# Altium PCB LibreSolar_BMS48V.PcbDoc (part 2 of 2)
Units mm, origin at the board's own origin, x right, y up, seen from the top; angles counter-clockwise.
Board outline 165 x 165 mm, 2 copper layers (Top, Bottom); 195 components, 138 nets, 620 pads, 56 vias.
Unrouted connection lines stored in the file: 54.
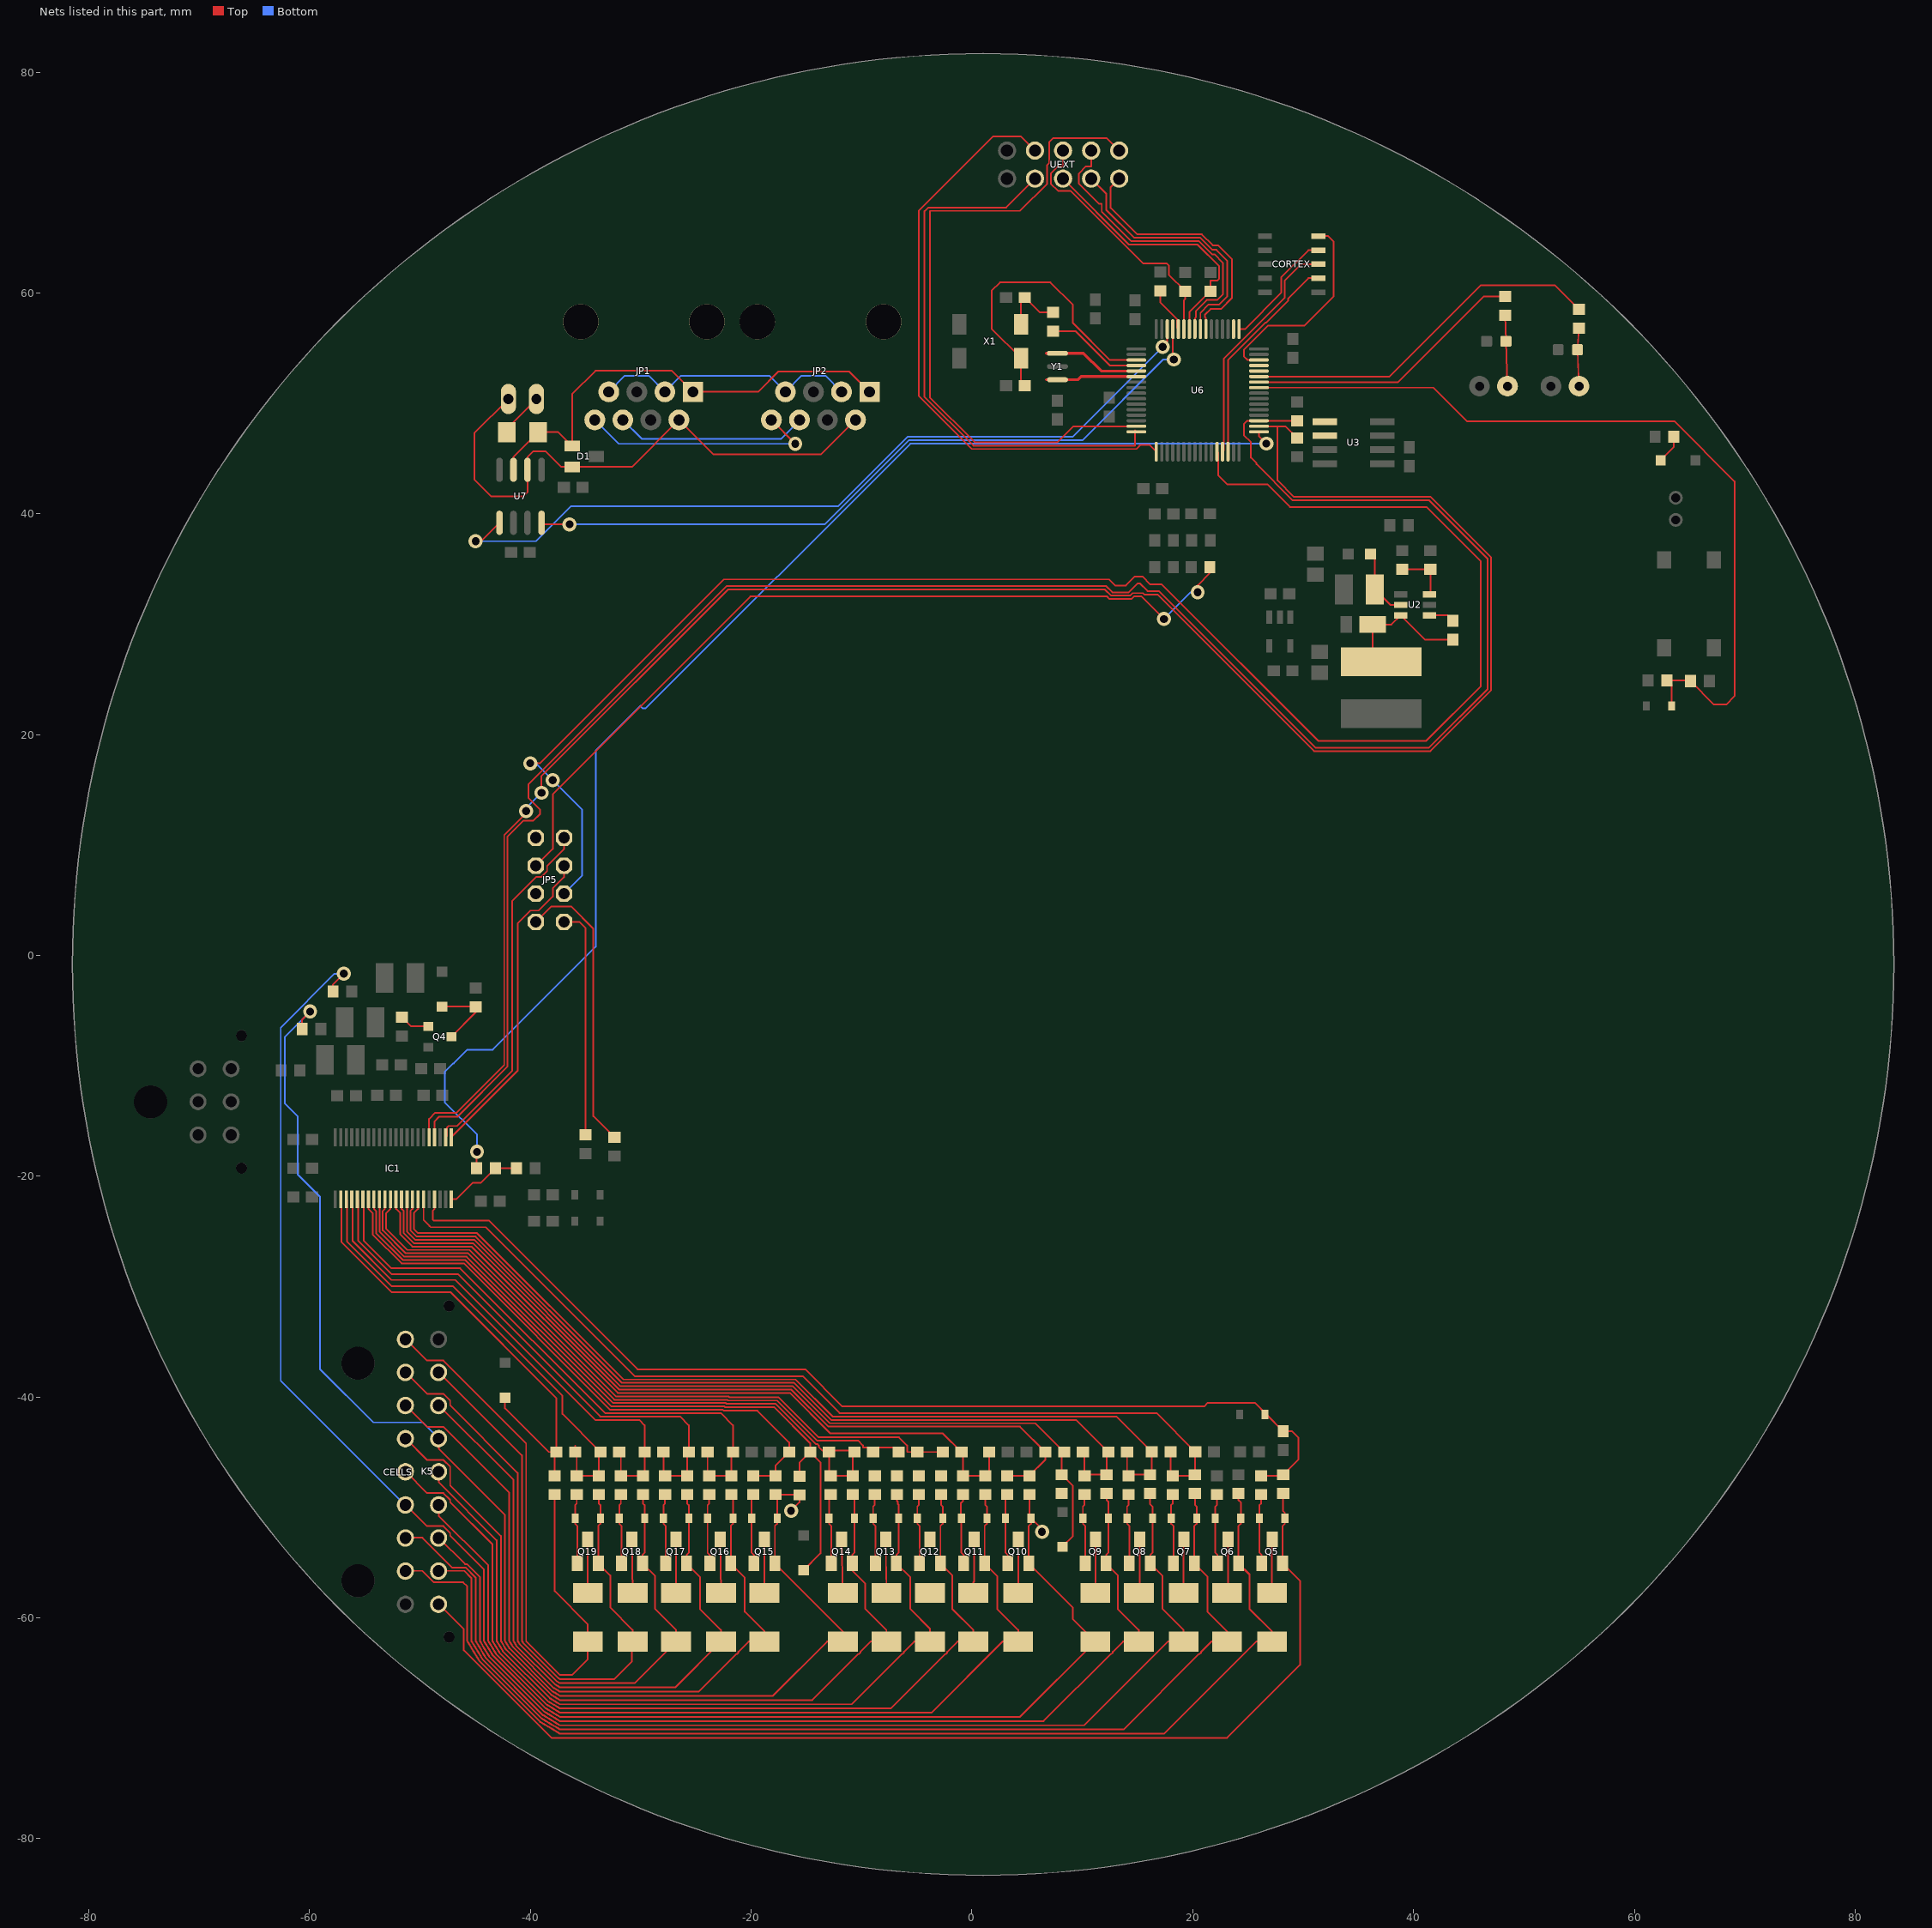
[diagram p2: the nets of this part, all layers, seen from the top]

## Via types
v1: diameter 1.27, hole 0.711, Top to Bottom, 56 vias

## Nets (pads, with @x,y where several pads share a name; then routed paths per layer and width w, separated by ;. In a path a pad name is that pad's centre, name@x,y a point inside that pad or via, vN(x,y) a via of type N, cw(c..) or ccw(c..) an arc to the next point about the centre after c; other vN are vias at no path point) (continued)
NetC23_1: C23.1 C24.2 IC1.39 R37.2 R55.1 | length 86.9
  Top w0.152: IC1.39@-49.672,-22.071 -49.672,-23.961 -49.199,-24.434 -49.11,-24.523 -49.021,-24.613 -44.031,-24.613 -30.543,-38.1 -15.338,-38.1 -11.985,-41.453 16.727,-41.453 C23.1@20.232,-44.958 20.193,-44.997 R37.2@20.193,-47.029 20.101,-47.121 R55.1@18.201,-47.121 17.995,-46.915 C24.2@17.995,-44.958
NetC24_1: C24.1 C25.2 IC1.38 R38.2 R56.1 | length 84.4
  Top w0.152: IC1.38@-50.172,-22.071 -50.172,-22.948 -50.563,-23.338 -50.563,-24.765 -50.182,-25.146 -44.834,-25.146 -31.575,-38.405 -15.976,-38.405 -12.623,-41.758 13.095,-41.758 C24.1@16.295,-44.958 16.295,-46.863 R38.2@16.129,-47.029 R56.1@14.109,-47.029 ; C25.2@14.051,-44.971 14.051,-46.971 R56.1@14.109,-47.029 ; R56.1@14.201,-47.121 R56.1@14.109,-47.029
NetC25_1: C25.1 C26.2 IC1.37 R39.2 R57.1 | length 80.8
  Top w0.152: IC1.37@-50.672,-22.071 -50.672,-22.948 -50.867,-23.143 -50.867,-24.891 -50.308,-25.451 -44.96,-25.451 -31.701,-38.71 -16.102,-38.71 -12.749,-42.062 9.442,-42.062 C25.1@12.351,-44.971 12.192,-45.13 R39.2@12.192,-47.029 10.293,-47.029 R57.1@10.201,-47.121 10.201,-45.121 C26.2@10.051,-44.971
NetC26_1: C26.1 D2.A IC1.36 R40.2 | length 80.2
  Top w0.152: IC1.36@-51.172,-22.071 -51.172,-25.018 -50.434,-25.756 -45.086,-25.756 -31.828,-39.014 -16.228,-39.014 -12.876,-42.367 5.747,-42.367 C26.1@8.351,-44.971 8.128,-45.194 R40.2@8.128,-47.029 9.144,-48.045 9.144,-52.578 8.201,-53.521 D2.A@8.201,-53.546
NetC27_1: C27.1 C28.2 IC1.34 R42.2 R59.1 | length 68.9
  Top w0.152: IC1.34@-52.172,-22.071 -52.172,-22.948 -51.782,-23.338 -51.782,-25.27 -50.687,-26.365 -45.339,-26.365 -32.08,-39.624 -16.481,-39.624 -12.823,-43.282 -2.639,-43.282 C28.2@-0.949,-44.971 -0.799,-45.121 R59.1@-0.799,-47.121 R42.2@1.201,-47.121 1.551,-46.771 C27.1@1.551,-44.971
NetC28_1: C28.1 C29.2 IC1.33 R43.2 R60.1 | length 62
  Top w0.152: IC1.33@-52.672,-22.071 -52.672,-22.948 -53.062,-23.338 -53.062,-24.765 -51.157,-26.67 -45.52,-26.67 -32.261,-39.929 -22.05,-39.929 -21.974,-40.005 -17.526,-40.005 -13.898,-43.633 -6.614,-43.633 -5.87,-44.377 -5.87,-44.971 C29.2@-4.949,-44.971 C28.1@-2.649,-44.971
NetC29_1: C29.1 C30.2 IC1.32 R44.2 R61.1 | length 58
  Top w0.152: IC1.32@-53.172,-22.071 -53.172,-22.948 -53.367,-23.143 -53.367,-24.891 -51.284,-26.975 -45.646,-26.975 -32.387,-40.234 -22.176,-40.234 -22.1,-40.31 -17.652,-40.31 -14.024,-43.938 -10.309,-43.938 -9.87,-44.377 -9.87,-44.547 -7.073,-44.547 C29.1@-6.649,-44.971
NetC30_1: C30.1 C31.2 IC1.31 R45.2 R62.1 | length 60.8
  Top w0.152: IC1.31@-53.672,-22.071 -53.672,-25.018 -51.41,-27.28 -45.772,-27.28 -32.513,-40.538 -22.303,-40.538 -22.226,-40.615 -17.779,-40.615 -14.15,-44.243 -14.004,-44.243 -13.87,-44.377 -13.87,-44.523 -13.541,-44.852 -10.649,-44.852 C30.1@-10.649,-44.971 -10.799,-45.121 R45.2@-10.799,-47.121 R62.1@-12.799,-47.121 -12.949,-46.971 C31.2@-12.949,-44.971
NetC31_1: C31.1 D3.A IC1.30 R46.2 | length 65.5
  Top w0.152: IC1.30@-54.172,-22.071 -54.172,-22.948 -53.977,-23.143 -53.977,-25.144 -51.536,-27.584 -45.899,-27.584 -32.64,-40.843 -22.429,-40.843 -22.353,-40.919 -17.905,-40.919 -14.649,-44.175 C31.1@-14.649,-44.971 ; R46.2@-15.621,-47.156 -15.621,-45.943 C31.1@-14.649,-44.971 ; D3.A@-15.24,-55.677 -13.716,-54.153 -13.716,-45.904 C31.1@-14.649,-44.971
NetC32_1: C32.1 C33.2 IC1.28 R48.2 R64.1 | length 53
  Top w0.152: IC1.28@-55.172,-22.071 -55.096,-22.148 -55.096,-25.807 -52.578,-28.325 -46.351,-28.325 -33.223,-41.453 -22.746,-41.453 -21.649,-42.55 C32.1@-21.649,-44.971 -21.799,-45.121 R48.2@-21.799,-47.121 R64.1@-23.799,-47.121 -23.949,-46.971 C33.2@-23.949,-44.971
NetC33_1: C33.1 C34.2 IC1.27 R49.2 R65.1 | length 49.5
  Top w0.152: IC1.27@-55.672,-22.071 -55.596,-22.148 -55.596,-25.84 -52.578,-28.858 -46.572,-28.858 -33.673,-41.758 -26.441,-41.758 -25.649,-42.55 C33.1@-25.649,-44.971 -25.799,-45.121 R49.2@-25.799,-47.121 R65.1@-27.799,-47.121 -27.949,-46.971 C34.2@-27.949,-44.971
NetC34_1: C34.1 C35.2 IC1.26 R50.2 R66.1 | length 46
  Top w0.152: IC1.26@-56.172,-22.071 -56.096,-22.148 -56.096,-25.874 -52.578,-29.392 -46.793,-29.392 -34.122,-42.062 -30.137,-42.062 -29.649,-42.55 C34.1@-29.649,-44.971 -29.649,-46.971 R50.2@-29.799,-47.121 R66.1@-31.799,-47.121 -31.799,-45.121 C35.2@-31.949,-44.971
NetC35_1: C35.1 C36.2 IC1.25 R51.2 R67.1 | length 42.5
  Top w0.152: IC1.25@-56.672,-22.071 -56.596,-22.148 -56.596,-25.923 -52.578,-29.941 -47.021,-29.941 -37.091,-39.871 -37.091,-41.529 C35.1@-33.649,-44.971 ; -35.949,-44.395 C36.2@-35.949,-44.971 -35.799,-45.121 R67.1@-35.799,-47.121 R51.2@-33.799,-47.121 C35.1@-33.799,-45.121
NetC36_1: C36.1 D4.A IC1.24 R52.2 | length 43.6
  Top w0.152: IC1.24@-57.172,-22.071 -57.096,-22.148 -57.096,-25.962 -52.578,-30.48 -47.244,-30.48 -37.649,-40.075 C36.1@-37.649,-44.971 ; D4.A@-42.291,-40.056 -42.291,-41.021 -38.341,-44.971 C36.1@-37.649,-44.971 ; R52.2@-37.799,-47.121 -37.799,-45.121 C36.1@-37.649,-44.971
NetC37_1: C37.1 D5.C IC1.41 R35.2 R53.1 | length 94.9
  Top w0.152: IC1.41@-48.672,-22.071 -48.672,-22.948 -48.824,-23.1 -48.824,-23.947 -48.768,-24.003 -43.778,-24.003 -30.291,-37.49 -15.085,-37.49 -11.733,-40.843 21.031,-40.843 21.361,-40.513 25.615,-40.513 D5.C@26.673,-41.571 ; R53.1@26.201,-47.121 28.102,-47.121 R35.2@28.194,-47.029 29.591,-45.632 29.591,-43.688 28.995,-43.092 C37.1@28.194,-43.092 D5.C@26.673,-41.571 ; D5.C@26.551,-41.571 D5.C@26.673,-41.571
NetC38_2: C38.2 IC1.35 R41.2 R58.1 | length 74.2
  Top w0.152: IC1.35@-51.672,-22.071 -51.672,-22.948 -51.477,-23.143 -51.477,-25.144 -50.56,-26.06 -45.213,-26.06 -31.954,-39.319 -16.355,-39.319 -13.002,-42.672 4.352,-42.672 C38.2@6.651,-44.971 6.651,-45.671 R41.2@5.201,-47.121 R58.1@3.201,-47.121
NetC39_2: C39.2 IC1.29 R47.2 R63.1 | length 54.4
  Top w0.152: IC1.29@-54.672,-22.071 -54.672,-22.948 -54.282,-23.338 -54.282,-25.27 -51.662,-27.889 -46.025,-27.889 -32.766,-41.148 -22.555,-41.148 -22.479,-41.224 -19.431,-41.224 -16.549,-44.106 C39.2@-16.549,-44.971 -17.799,-46.221 R47.2@-17.799,-47.121 R63.1@-19.799,-47.121
NetC40_1: C40.1 U2.1 | length 2.3
  Top w0.152: U2.1@41.432,30.8 43.075,30.8 C40.1@43.561,30.314
NetC40_2: C40.2 D22.C L1.1 U2.6 | length 12.2
  Top w0.152: L1.1@37.084,26.607 36.284,27.407 D22.C@36.284,29.972 38.004,29.972 U2.6@38.832,30.8 41.018,28.614 C40.2@43.561,28.614
NetC41_1: C41.1 L2.1 U2.5 | length 6.3
  Top w0.152: L2.1@36.094,36.353 36.494,35.953 C41.1@36.494,33.153 37.897,31.75 U2.5@38.832,31.75
NetC47_1: C47.1 R7.2 X1.1 | length 5.7
  Top w0.152: X1.1@4.445,57.15 4.445,59.241 C47.1@4.798,59.594 6.148,58.244 R7.2@7.348,58.244
NetC48_1: C48.1 U6.3 X1.4 | length 27.2
  Top w0.152: C48.1@4.798,51.594 4.445,51.947 X1.4@4.445,54.102 1.778,56.769 1.778,60.198 2.54,60.96 7.112,60.96 9.144,58.928 9.144,57.277 12.49,53.931 U6.3@14.897,53.931
NetCELLS_2: CELLS.2 D8.A K5.2 Q6.2 R20.1 R36.1 | length 106.2
  Top w0.152: K5.2@-51.308,-55.736 -49.785,-55.736 -48.74,-56.78 -46.09,-56.78 -45.72,-57.15 -45.72,-62.103 -45.644,-62.179 -45.644,-62.229 -45.568,-62.305 -45.568,-62.356 -45.491,-62.432 -45.491,-62.482 -45.415,-62.558 -45.415,-62.608 -45.339,-62.684 -45.339,-62.734 -45.263,-62.81 -45.263,-62.861 -45.187,-62.937 -45.187,-62.987 -45.11,-63.063 -45.11,-63.113 -45.034,-63.189 -45.034,-63.239 -44.958,-63.315 -44.958,-63.366 -44.882,-63.442 -44.882,-63.492 -44.806,-63.568 -44.806,-63.618 -44.729,-63.694 -44.729,-63.744 -44.653,-63.82 -44.653,-63.871 -39.106,-69.418 -39.055,-69.418 -38.979,-69.494 -38.929,-69.494 -38.853,-69.571 -38.803,-69.571 -38.727,-69.647 -38.677,-69.647 -38.601,-69.723 -38.55,-69.723 -38.474,-69.799 -38.424,-69.799 -38.348,-69.875 -38.298,-69.875 -38.222,-69.952 -38.172,-69.952 -38.096,-70.028 -38.045,-70.028 -37.969,-70.104 -37.919,-70.104 -37.843,-70.18 -37.793,-70.18 -37.717,-70.256 -37.667,-70.256 -37.591,-70.333 -37.54,-70.333 -37.464,-70.409 -37.414,-70.409 -37.338,-70.485 17.411,-70.485 25.752,-62.144 R20.1@27.178,-62.144 27.178,-61.214 25.146,-59.182 25.146,-56.066 Q6.2@24.151,-55.071 24.151,-51.663 24.351,-51.462 D8.A@24.351,-50.971 24.351,-49.526 24.13,-49.305 R36.1@24.13,-48.729
NetCELLS_3: CELLS.3 D10.A K5.3 Q8.2 R22.1 R38.1 | length 99.2
  Top w0.152: K5.3@-51.308,-52.736 -49.785,-52.736 -47.09,-55.431 -45.865,-55.431 -44.958,-56.338 -44.958,-62.103 -44.882,-62.179 -44.882,-62.229 -44.806,-62.305 -44.806,-62.356 -44.729,-62.432 -44.729,-62.482 -44.653,-62.558 -44.653,-62.608 -44.577,-62.684 -44.577,-62.734 -44.501,-62.81 -44.501,-62.861 -44.425,-62.937 -44.425,-62.987 -44.348,-63.063 -44.348,-63.113 -44.272,-63.189 -44.272,-63.239 -44.196,-63.315 -44.196,-63.366 -44.12,-63.442 -44.12,-63.492 -44.044,-63.568 -44.044,-63.618 -38.853,-68.809 -38.803,-68.809 -38.727,-68.885 -38.677,-68.885 -38.601,-68.961 -38.55,-68.961 -38.474,-69.037 -38.424,-69.037 -38.348,-69.113 -38.298,-69.113 -38.222,-69.19 -38.172,-69.19 -38.096,-69.266 -38.045,-69.266 -37.969,-69.342 -37.919,-69.342 -37.843,-69.418 -37.793,-69.418 -37.717,-69.494 -37.667,-69.494 -37.591,-69.571 -37.54,-69.571 -37.464,-69.647 -37.414,-69.647 -37.338,-69.723 10.172,-69.723 17.751,-62.144 R22.1@19.177,-62.144 19.177,-61.087 17.272,-59.182 17.272,-56.192 Q8.2@16.151,-55.071 16.151,-54.295 16.351,-54.095 D10.A@16.351,-50.971 16.351,-49.911 16.129,-49.689 R38.1@16.129,-48.729
NetCELLS_4: CELLS.4 D12.A K5.4 Q10.2 R13.1 R24.1 R40.1 R41.1 | length 152.8
  Top w0.152: R13.1@-57.872,-3.255 -57.872,-2.627 v1(-56.896,-1.651) ; K5.4@-51.308,-49.736 -49.352,-51.692 -47.875,-51.692 -47.263,-52.303 -47.263,-52.559 -44.196,-55.626 -44.196,-62.103 -44.12,-62.179 -44.12,-62.229 -44.044,-62.305 -44.044,-62.356 -43.967,-62.432 -43.967,-62.482 -43.891,-62.558 -43.891,-62.608 -43.815,-62.684 -43.815,-62.734 -43.739,-62.81 -43.739,-62.861 -43.663,-62.937 -43.663,-62.987 -43.586,-63.063 -43.586,-63.113 -43.51,-63.189 -43.51,-63.239 -43.434,-63.315 -43.434,-63.366 -38.601,-68.199 -38.55,-68.199 -38.474,-68.275 -38.424,-68.275 -38.348,-68.351 -38.298,-68.351 -38.222,-68.428 -38.172,-68.428 -38.096,-68.504 -38.045,-68.504 -37.969,-68.58 -37.919,-68.58 -37.843,-68.656 -37.793,-68.656 -37.717,-68.732 -37.667,-68.732 -37.591,-68.809 -37.54,-68.809 -37.464,-68.885 -37.414,-68.885 -37.338,-68.961 4.359,-68.961 R24.1@11.176,-62.144 9.144,-60.112 9.144,-59.064 Q10.2@5.151,-55.071 5.151,-51.663 5.351,-51.462 D12.A@5.351,-50.971 ; R41.1@5.201,-48.821 5.201,-50.821 D12.A@5.351,-50.971 ; v1(6.35,-52.197) 6.35,-51.97 D12.A@5.351,-50.971
  Bottom w0.152: v1(-56.896,-1.651) -57.736,-1.651 -62.611,-6.526 -62.611,-38.507 CELLS.4@-51.326,-49.792
NetCELLS_5: CELLS.5 D14.A K5.5 Q12.2 R26.1 R43.1 | length 83.1
  Top w0.152: K5.5@-51.308,-46.736 -49.352,-48.692 -47.875,-48.692 -47.263,-49.303 -47.263,-49.511 -43.434,-53.34 -43.434,-62.103 -43.358,-62.179 -43.358,-62.229 -43.282,-62.305 -43.282,-62.356 -43.205,-62.432 -43.205,-62.482 -43.129,-62.558 -43.129,-62.608 -43.053,-62.684 -43.053,-62.734 -42.977,-62.81 -42.977,-62.861 -42.901,-62.937 -42.901,-62.987 -42.824,-63.063 -42.824,-63.113 -38.348,-67.589 -38.298,-67.589 -38.222,-67.666 -38.172,-67.666 -38.096,-67.742 -38.045,-67.742 -37.969,-67.818 -37.919,-67.818 -37.843,-67.894 -37.793,-67.894 -37.717,-67.97 -37.667,-67.97 -37.591,-68.047 -37.54,-68.047 -37.464,-68.123 -37.414,-68.123 -37.338,-68.199 -7.354,-68.199 -2.428,-63.273 -2.365,-63.273 -2.231,-63.139 -2.231,-63.076 -1.299,-62.144 R26.1@0.127,-62.144 0.127,-61.087 -1.786,-59.174 -1.786,-56.134 Q12.2@-2.849,-55.071 -2.849,-51.663 -2.649,-51.462 D14.A@-2.649,-50.971 -2.649,-49.911 -2.799,-49.761 R43.1@-2.799,-48.821
NetCELLS_6: CELLS.6 D16.A K5.6 Q14.2 R28.1 R45.1 | length 77.1
  Top w0.152: K5.6@-51.308,-43.736 -49.352,-45.692 -47.875,-45.692 -47.263,-46.303 -47.263,-47.987 -42.672,-52.578 -42.672,-62.103 -42.596,-62.179 -42.596,-62.229 -42.52,-62.305 -42.52,-62.356 -42.443,-62.432 -42.443,-62.482 -42.367,-62.558 -42.367,-62.608 -42.291,-62.684 -42.291,-62.734 -42.215,-62.81 -42.215,-62.861 -38.096,-66.98 -38.045,-66.98 -37.969,-67.056 -37.919,-67.056 -37.843,-67.132 -37.793,-67.132 -37.717,-67.208 -37.667,-67.208 -37.591,-67.285 -37.54,-67.285 -37.464,-67.361 -37.414,-67.361 -37.338,-67.437 -14.466,-67.437 -10.302,-63.273 -10.239,-63.273 -10.105,-63.139 -10.105,-63.076 -9.173,-62.144 R28.1@-7.747,-62.144 -7.747,-61.087 -9.652,-59.182 -9.652,-56.896 -10.849,-55.699 Q14.2@-10.849,-55.071 -10.849,-54.295 -10.649,-54.095 D16.A@-10.649,-50.971 -10.649,-48.971 R45.1@-10.799,-48.821
NetCELLS_7: CELLS.7 D18.A K5.7 Q16.2 R30.1 R48.1 | length 67.9
  Top w0.152: K5.7@-51.308,-40.736 -49.352,-42.692 -47.875,-42.692 -41.91,-48.657 -41.91,-62.103 -41.834,-62.179 -41.834,-62.229 -41.758,-62.305 -41.758,-62.356 -41.681,-62.432 -41.681,-62.482 -41.605,-62.558 -41.605,-62.608 -37.843,-66.37 -37.793,-66.37 -37.717,-66.446 -37.667,-66.446 -37.591,-66.523 -37.54,-66.523 -37.464,-66.599 -37.414,-66.599 -37.338,-66.675 -24.753,-66.675 -21.351,-63.273 -21.288,-63.273 -21.154,-63.139 -21.154,-63.076 -20.222,-62.144 R30.1@-18.796,-62.144 -18.796,-61.214 -20.574,-59.436 -20.574,-56.346 Q16.2@-21.849,-55.071 -21.849,-51.663 -21.649,-51.462 D18.A@-21.649,-50.971 -21.649,-48.971 R48.1@-21.799,-48.821
NetCELLS_8: CELLS.8 D20.A K5.8 Q18.2 R32.1 R50.1 | length 61.7
  Top w0.152: K5.8@-51.308,-37.736 -49.352,-39.692 -47.875,-39.692 -47.263,-40.303 -47.263,-40.748 -41.148,-46.863 -41.148,-62.103 -41.072,-62.179 -41.072,-62.229 -40.996,-62.305 -40.996,-62.356 -37.591,-65.761 -37.54,-65.761 -37.464,-65.837 -37.414,-65.837 -37.338,-65.913 -30.566,-65.913 R32.1@-26.797,-62.144 -26.797,-61.087 -28.702,-59.182 -28.702,-56.218 Q18.2@-29.849,-55.071 -29.849,-54.295 -29.649,-54.095 D20.A@-29.649,-50.971 -29.649,-49.784 -29.799,-49.634 R50.1@-29.799,-48.821
NetCELLS_9: CELLS.9 K5.9 R34.1 R52.1 | length 56.4
  Top w0.152: K5.9@-51.308,-34.736 -49.352,-36.692 -47.875,-36.692 -47.263,-37.303 -47.263,-37.319 -40.386,-44.196 -40.386,-62.103 -37.338,-65.151 -36.195,-65.151 -34.798,-63.754 R34.1@-34.798,-62.144 -34.798,-60.579 -37.799,-57.578 R52.1@-37.799,-48.821
NetCELLS_10: CELLS.10 D7.A K5.10 Q5.2 R35.1 | length 103.2
  Top w0.152: K5.10@-48.308,-58.736 -46.025,-61.019 -46.025,-62.93 -38.089,-70.866 23.114,-70.866 29.718,-64.262 29.718,-56.638 Q5.2@28.151,-55.071 28.151,-51.663 28.351,-51.462 D7.A@28.351,-50.971 28.351,-50.48 28.194,-50.323 R35.1@28.194,-48.729
NetCELLS_11: CELLS.11 D9.A K5.11 Q7.2 R21.1 R37.1 | length 99.2
  Top w0.152: K5.11@-48.308,-55.736 -45.991,-55.736 -45.339,-56.388 -45.339,-62.103 -45.263,-62.179 -45.263,-62.229 -45.187,-62.305 -45.187,-62.356 -45.11,-62.432 -45.11,-62.482 -45.034,-62.558 -45.034,-62.608 -44.958,-62.684 -44.958,-62.734 -44.882,-62.81 -44.882,-62.861 -44.806,-62.937 -44.806,-62.987 -44.729,-63.063 -44.729,-63.113 -44.653,-63.189 -44.653,-63.239 -44.577,-63.315 -44.577,-63.366 -44.501,-63.442 -44.501,-63.492 -44.425,-63.568 -44.425,-63.618 -44.348,-63.694 -44.348,-63.744 -38.979,-69.113 -38.929,-69.113 -38.853,-69.19 -38.803,-69.19 -38.727,-69.266 -38.677,-69.266 -38.601,-69.342 -38.55,-69.342 -38.474,-69.418 -38.424,-69.418 -38.348,-69.494 -38.298,-69.494 -38.222,-69.571 -38.172,-69.571 -38.096,-69.647 -38.045,-69.647 -37.969,-69.723 -37.919,-69.723 -37.843,-69.799 -37.793,-69.799 -37.717,-69.875 -37.667,-69.875 -37.591,-69.952 -37.54,-69.952 -37.464,-70.028 -37.414,-70.028 -37.338,-70.104 13.728,-70.104 20.559,-63.273 20.622,-63.273 20.756,-63.139 20.756,-63.076 21.688,-62.144 R21.1@23.114,-62.144 23.114,-61.214 21.336,-59.436 21.336,-56.256 Q7.2@20.151,-55.071 20.151,-51.663 20.351,-51.462 D9.A@20.351,-50.971 20.351,-49.911 20.193,-49.753 R37.1@20.193,-48.729
NetCELLS_12: CELLS.12 D11.A K5.12 Q9.2 R23.1 R39.1 | length 91.8
  Top w0.152: K5.12@-48.308,-52.736 -45.917,-55.126 -45.739,-55.126 -44.577,-56.288 -44.577,-62.103 -44.501,-62.179 -44.501,-62.229 -44.425,-62.305 -44.425,-62.356 -44.348,-62.432 -44.348,-62.482 -44.272,-62.558 -44.272,-62.608 -44.196,-62.684 -44.196,-62.734 -44.12,-62.81 -44.12,-62.861 -44.044,-62.937 -44.044,-62.987 -43.967,-63.063 -43.967,-63.113 -43.891,-63.189 -43.891,-63.239 -43.815,-63.315 -43.815,-63.366 -43.739,-63.442 -43.739,-63.492 -38.727,-68.504 -38.677,-68.504 -38.601,-68.58 -38.55,-68.58 -38.474,-68.656 -38.424,-68.656 -38.348,-68.732 -38.298,-68.732 -38.222,-68.809 -38.172,-68.809 -38.096,-68.885 -38.045,-68.885 -37.969,-68.961 -37.919,-68.961 -37.843,-69.037 -37.793,-69.037 -37.717,-69.113 -37.667,-69.113 -37.591,-69.19 -37.54,-69.19 -37.464,-69.266 -37.414,-69.266 -37.338,-69.342 6.489,-69.342 12.558,-63.273 12.621,-63.273 12.755,-63.139 12.755,-63.076 13.687,-62.144 R23.1@15.113,-62.144 15.113,-61.087 13.208,-59.182 13.208,-56.128 Q9.2@12.151,-55.071 12.151,-54.295 12.351,-54.095 D11.A@12.351,-50.971 12.351,-49.464 12.192,-49.305 R39.1@12.192,-48.729
NetCELLS_13: CELLS.13 D13.A K5.13 Q11.2 R25.1 R42.1 | length 82.6
  Top w0.152: K5.13@-48.308,-49.736 -48.308,-50.752 -43.815,-55.245 -43.815,-62.103 -43.739,-62.179 -43.739,-62.229 -43.663,-62.305 -43.663,-62.356 -43.586,-62.432 -43.586,-62.482 -43.51,-62.558 -43.51,-62.608 -43.434,-62.684 -43.434,-62.734 -43.358,-62.81 -43.358,-62.861 -43.282,-62.937 -43.282,-62.987 -43.205,-63.063 -43.205,-63.113 -43.129,-63.189 -43.129,-63.239 -38.474,-67.894 -38.424,-67.894 -38.348,-67.97 -38.298,-67.97 -38.222,-68.047 -38.172,-68.047 -38.096,-68.123 -38.045,-68.123 -37.969,-68.199 -37.919,-68.199 -37.843,-68.275 -37.793,-68.275 -37.717,-68.351 -37.667,-68.351 -37.591,-68.428 -37.54,-68.428 -37.464,-68.504 -37.414,-68.504 -37.338,-68.58 -3.671,-68.58 2.765,-62.144 R25.1@4.191,-62.144 4.191,-61.087 2.286,-59.182 2.286,-56.206 Q11.2@1.151,-55.071 1.151,-51.663 1.351,-51.462 D13.A@1.351,-50.971 1.351,-49.911 1.201,-49.761 R42.1@1.201,-48.821
NetCELLS_14: CELLS.14 D15.A K5.14 Q13.2 R27.1 R44.1 | length 76.5
  Top w0.152: K5.14@-48.308,-46.736 -48.308,-47.704 -43.053,-52.959 -43.053,-62.103 -42.977,-62.179 -42.977,-62.229 -42.901,-62.305 -42.901,-62.356 -42.824,-62.432 -42.824,-62.482 -42.748,-62.558 -42.748,-62.608 -42.672,-62.684 -42.672,-62.734 -42.596,-62.81 -42.596,-62.861 -42.52,-62.937 -42.52,-62.987 -38.222,-67.285 -38.172,-67.285 -38.096,-67.361 -38.045,-67.361 -37.969,-67.437 -37.919,-67.437 -37.843,-67.513 -37.793,-67.513 -37.717,-67.589 -37.667,-67.589 -37.591,-67.666 -37.54,-67.666 -37.464,-67.742 -37.414,-67.742 -37.338,-67.818 -10.91,-67.818 -6.365,-63.273 -6.302,-63.273 -6.168,-63.139 -6.168,-63.076 -5.236,-62.144 R27.1@-3.81,-62.144 -3.81,-60.96 -5.588,-59.182 -5.588,-56.332 Q13.2@-6.849,-55.071 -6.849,-54.295 -6.649,-54.095 D15.A@-6.649,-50.971 -6.649,-49.739 -6.731,-49.657 -6.731,-49.465 -6.799,-49.397 R44.1@-6.799,-48.821
NetCELLS_15: CELLS.15 D17.A K5.15 Q15.2 R12.1 R29.1 R46.1 R47.1 | length 125.5
  Top w0.152: R12.1@-60.672,-6.655 -60.672,-5.808 v1(-59.944,-5.08) ; K5.15@-48.308,-43.736 -48.308,-44.656 -42.291,-50.673 -42.291,-62.103 -42.215,-62.179 -42.215,-62.229 -42.139,-62.305 -42.139,-62.356 -42.062,-62.432 -42.062,-62.482 -41.986,-62.558 -41.986,-62.608 -41.91,-62.684 -41.91,-62.734 -37.969,-66.675 -37.919,-66.675 -37.843,-66.751 -37.793,-66.751 -37.717,-66.827 -37.667,-66.827 -37.591,-66.904 -37.54,-66.904 -37.464,-66.98 -37.414,-66.98 -37.338,-67.056 -18.022,-67.056 -13.11,-62.144 R29.1@-11.684,-62.144 -11.684,-61.236 Q15.2@-17.849,-55.071 -17.849,-51.663 -17.649,-51.462 D17.A@-17.649,-50.971 -17.649,-48.971 R47.1@-17.799,-48.821 -15.656,-48.821 R46.1@-15.621,-48.856 -15.621,-49.53 v1(-16.383,-50.292)
  Bottom w0.152: v1(-59.944,-5.08) -62.23,-7.366 -62.23,-13.413 -61.087,-14.556 -61.087,-19.812 -59.055,-21.844 -59.055,-37.465 -54.229,-42.291 -49.753,-42.291 K5.15@-48.308,-43.736
NetCELLS_16: CELLS.16 D19.A K5.16 Q17.2 R31.1 R49.1 | length 61.3
  Top w0.152: K5.16@-48.308,-40.736 -41.529,-47.515 -41.529,-62.103 -41.453,-62.179 -41.453,-62.229 -41.377,-62.305 -41.377,-62.356 -41.3,-62.432 -41.3,-62.482 -37.717,-66.065 -37.667,-66.065 -37.591,-66.142 -37.54,-66.142 -37.464,-66.218 -37.414,-66.218 -37.338,-66.294 -26.883,-66.294 R31.1@-22.733,-62.144 -22.733,-61.087 -24.638,-59.182 -24.638,-56.282 Q17.2@-25.849,-55.071 -25.849,-54.295 -25.649,-54.095 D19.A@-25.649,-50.971 -25.649,-49.784 -25.799,-49.634 R49.1@-25.799,-48.821
NetCELLS_17: CELLS.17 D21.A K5.17 Q19.2 R33.1 R51.1 | length 56.2
  Top w0.152: K5.17@-48.308,-37.736 -40.767,-45.277 -40.767,-62.103 -40.691,-62.179 -40.691,-62.229 -37.464,-65.456 -37.414,-65.456 -37.338,-65.532 -32.385,-65.532 -30.81,-63.957 -30.81,-62.22 R33.1@-30.734,-62.144 -30.734,-61.087 -32.766,-59.055 -32.766,-56.154 Q19.2@-33.849,-55.071 -33.849,-51.663 -33.649,-51.462 D21.A@-33.649,-50.971 -33.649,-49.784 -33.799,-49.634 R51.1@-33.799,-48.821
NetCORTEX_2: CORTEX.2 U6.46 | length 18.8
  Top w0.152: U6.46@25.997,53.931 24.99,53.931 24.638,54.283 24.638,54.864 26.822,57.048 30.124,57.048 32.766,59.69 32.766,64.643 32.258,65.151 CORTEX.2@31.369,65.151
NetCORTEX_4: CORTEX.4 U6.49 | length 11
  Top w0.152: U6.49@24.197,56.731 24.727,56.731 28.016,60.02 28.016,61.417 30.48,63.881 CORTEX.4@31.369,63.881
NetCORTEX_6: CORTEX.6 U6.29 | length 21.5
  Top w0.152: U6.29@22.697,45.631 22.818,45.752 22.818,54.06 28.321,59.563 28.321,61.087 29.845,62.611 CORTEX.6@31.369,62.611
NetCORTEX_8: CORTEX.8 U6.30 | length 19.7
  Top w0.152: U6.30@23.197,45.631 23.197,53.931 26.594,57.328 26.671,57.328 28.626,59.283 28.626,59.487 30.48,61.341 CORTEX.8@31.369,61.341
NetD1_1: D1.1 JP1.1 JP2.1 R4.1 U7.7 | length 42.8
  Top w0.152: U7.7@-41.529,43.985 -41.529,45.163 R4.1@-39.298,47.394 -37.47,47.394 D1.1@-36.22,46.144 -36.22,50.831 -34.104,52.947 -27.178,52.947 JP1.1@-25.275,51.044 -19.37,51.044 -17.526,52.888 -11.119,52.888 JP2.1@-9.275,51.044
NetD1_2: D1.2 JP1.2 JP2.2 JP3.2 U7.6 | length 52.2
  Top w0.152: JP3.2@-41.99,50.394 -45.085,47.299 -45.085,43.109 -43.561,41.585 -40.64,41.585 -40.259,41.966 U7.6@-40.259,43.985 -40.259,45.141 -39.751,45.649 -38.608,45.649 -37.203,44.244 D1.2@-36.22,44.244 -30.805,44.244 JP1.2@-26.545,48.504 -23.436,45.395 -13.654,45.395 JP2.2@-10.545,48.504
NetD6_C: D6.C Q4.3 R6.2 | length 6.7
  Top w0.152: D6.C@-48.006,-4.623 -44.995,-4.623 R6.2@-44.958,-4.66 -44.958,-5.164 Q4.3@-47.16,-7.366
NetD7_C: D7.C Q5.1 R53.2 | length 6.4
  Top w0.152: R53.2@26.201,-48.821 26.201,-49.618 26.051,-49.768 D7.C@26.051,-50.971 26.051,-54.095 26.251,-54.295 Q5.1@26.251,-55.071
NetD8_C: D8.C Q6.1 R54.2 | length 6.4
  Top w0.152: R54.2@22.201,-48.821 22.201,-49.761 22.051,-49.911 D8.C@22.051,-50.971 22.051,-54.095 22.251,-54.295 Q6.1@22.251,-55.071
NetD9_C: D9.C Q7.1 R55.2 | length 6.4
  Top w0.152: R55.2@18.201,-48.821 18.201,-49.617 18.051,-49.767 D9.C@18.051,-50.971 18.051,-51.462 18.251,-51.663 Q7.1@18.251,-55.071
NetD10_C: D10.C Q8.1 R56.2 | length 6.4
  Top w0.152: R56.2@14.201,-48.821 14.201,-49.761 14.051,-49.911 D10.C@14.051,-50.971 14.051,-51.462 14.251,-51.663 Q8.1@14.251,-55.071
NetD11_C: D11.C Q9.1 R57.2 | length 6.4
  Top w0.152: R57.2@10.201,-48.821 10.201,-49.761 10.051,-49.911 D11.C@10.051,-50.971 10.051,-51.462 10.251,-51.663 Q9.1@10.251,-55.071
NetD12_C: D12.C Q10.1 R58.2 | length 6.4
  Top w0.152: R58.2@3.201,-48.821 3.051,-48.971 D12.C@3.051,-50.971 3.051,-54.095 3.251,-54.295 Q10.1@3.251,-55.071
NetD13_C: D13.C Q11.1 R59.2 | length 6.4
  Top w0.152: D13.C@-1.016,-50.971 -1.016,-49.614 -0.799,-49.397 R59.2@-0.799,-48.821 ; D13.C@-0.949,-50.971 -0.949,-54.095 -0.749,-54.295 Q11.1@-0.749,-55.071
NetD14_C: D14.C Q12.1 R60.2 | length 6.4
  Top w0.152: R60.2@-4.799,-48.821 -4.799,-49.761 -4.949,-49.911 D14.C@-4.949,-50.971 -4.949,-51.462 -4.749,-51.663 Q12.1@-4.749,-55.071
NetD15_C: D15.C Q13.1 R61.2 | length 6.4
  Top w0.152: R61.2@-8.799,-48.821 -8.799,-49.761 -8.949,-49.911 D15.C@-8.949,-50.971 -8.949,-51.462 -8.749,-51.663 Q13.1@-8.749,-55.071
NetD16_C: D16.C Q14.1 R62.2 | length 6.4
  Top w0.152: R62.2@-12.799,-48.821 -12.949,-48.971 D16.C@-12.949,-50.971 -12.949,-51.462 -12.749,-51.663 Q14.1@-12.749,-55.071
NetD17_C: D17.C Q15.1 R63.2 | length 6.4
  Top w0.152: R63.2@-19.799,-48.821 -19.949,-48.971 D17.C@-19.949,-50.971 -19.949,-54.095 -19.749,-54.295 Q15.1@-19.749,-55.071
NetD18_C: D18.C Q16.1 R64.2 | length 6.4
  Top w0.152: R64.2@-23.799,-48.821 -23.799,-49.634 -23.949,-49.784 D18.C@-23.949,-50.971 -23.949,-54.095 -23.749,-54.295 Q16.1@-23.749,-55.071
NetD19_C: D19.C Q17.1 R65.2 | length 6.4
  Top w0.152: R65.2@-27.799,-48.821 -27.799,-49.634 -27.949,-49.784 D19.C@-27.949,-50.971 -27.949,-51.462 -27.749,-51.663 Q17.1@-27.749,-55.071
NetD20_C: D20.C Q18.1 R66.2 | length 6.4
  Top w0.152: R66.2@-31.799,-48.821 -31.799,-49.634 -31.949,-49.784 D20.C@-31.949,-50.971 -31.949,-51.462 -31.749,-51.663 Q18.1@-31.749,-55.071
NetD21_C: D21.C Q19.1 R67.2 | length 6.4
  Top w0.152: R67.2@-35.799,-48.821 -35.799,-49.634 -35.949,-49.784 D21.C@-35.949,-50.971 -35.949,-51.462 -35.749,-51.663 Q19.1@-35.749,-55.071
NetD24_A: D24.A LED1.A R70.1 | length 6.4
  Top w0.152: R70.1@48.315,57.976 D24.A@48.375,55.626 LED1.A@48.514,51.562
NetD26_A: D26.A LED2.A R71.1 | length 5.3
  Top w0.152: LED2.A@54.991,51.562 D26.A@54.852,54.864 R71.1@54.991,56.808
NetD29_C: D29.C R15.2 | length 2.6
  Top w0.152: D29.C@62.376,44.85 63.588,46.062 R15.2@63.588,46.99
NetD30_C: D30.C R72.2 R73.1 U6.41 | length 75.9
  Top w0.152: U6.41@25.997,51.431 41.787,51.431 44.831,48.387 63.627,48.387 69.088,42.926 69.088,23.495 68.326,22.733 67.218,22.733 R73.1@65.101,24.85 65.036,24.915 R72.2@62.953,24.915 63.38,24.488 D30.C@63.38,22.606
NetIC1_1: IC1.1 JP5.4 | length 29.3
  Top w0.152: IC1.1@-47.172,-16.471 -41.148,-10.447 -41.148,2.899 -39.982,4.065 -39.242,4.065 -37.974,5.333 -37.974,6.073 -36.957,7.09 JP5.4@-36.957,8.128
NetIC1_2: IC1.2 JP5.2 | length 32.3
  Top w0.152: IC1.2@-47.672,-16.471 -47.546,-16.345 -47.546,-15.576 -47.412,-15.443 -46.643,-15.443 -41.656,-10.455 -41.656,4.931 -39.476,7.111 -39.012,7.111 -38.48,7.643 -38.48,8.107 -36.957,9.63 JP5.2@-36.957,10.668
NetIC1_4: IC1.4 R3.1 U3.5 U6.35 | length 186.7
  Top w0.152: IC1.4@-48.672,-16.471 -48.672,-15.017 -48.26,-14.605 -46.609,-14.605 -42.062,-10.058 -42.062,10.77 -40.64,12.192 -39.751,12.192 -39.116,12.827 -39.116,13.208 -40.183,14.275 -40.183,15.493 -22.808,32.868 -22.224,33.452 12.167,33.452 12.726,32.893 14.198,32.893 15.011,33.706 15.199,33.706 15.91,32.995 16.943,32.995 31.116,18.821 41.401,18.821 41.49,18.911 41.579,19 46.711,24.131 46.711,35.94 41.426,41.224 29.057,41.224 25.781,44.5 25.781,44.577 25.273,45.085 25.273,46.482 24.638,47.117 24.638,48.133 24.936,48.431 U6.35@25.997,48.431 29.42,48.431 29.464,48.387 29.632,48.387 R3.1@29.675,48.344
NetIC1_5: IC1.5 R5.1 U3.6 U6.34 | length 182.9
  Top w0.152: IC1.5@-49.172,-16.471 -49.172,-14.81 -48.614,-14.251 -46.686,-14.251 -42.367,-9.932 -42.367,10.896 -40.386,12.877 v1(-40.386,13.081) ; v1(-38.989,14.732) -38.989,16.256 -22.098,33.147 12.04,33.147 12.599,32.588 14.325,32.588 14.553,32.817 15.493,32.817 15.62,32.69 16.817,32.69 30.99,18.517 41.527,18.517 41.616,18.606 41.705,18.695 41.795,18.784 47.015,24.005 47.015,36.066 41.552,41.529 29.183,41.529 27.686,43.026 27.686,47.931 ; U6.34@25.997,47.931 27.686,47.931 ; R5.1@29.464,46.875 28.408,47.931 27.686,47.931 ; R5.1@29.464,47.117 R5.1@29.507,47.074 ; U3.6@32.625,47.205 U3.6@32.756,47.074
  Bottom w0.152: v1(-40.386,13.081) -40.386,13.335 v1(-38.989,14.732)
NetIC1_44: IC1.44 R75.1 R76.2 | length 7.1
  Top w0.152: IC1.44@-47.172,-22.071 -46.709,-22.071 -45.212,-20.574 -44.475,-20.574 R75.1@-43.172,-19.271 R76.2@-41.272,-19.271
NetJP1_3: JP1.3 JP1.7 JP2.3 JP2.7 | length 24.7
  Bottom w0.152: JP1.7@-32.895,51.044 -31.432,52.507 -29.278,52.507 JP1.3@-27.815,51.044 -26.352,52.507 -18.358,52.507 JP2.7@-16.895,51.044 -15.432,52.507 -13.278,52.507 JP2.3@-11.815,51.044
NetJP1_6: JP1.6 JP2.6 | length 17.5
  Bottom w0.152: JP1.6@-31.625,48.504 -29.913,46.792 -17.272,46.792 -15.625,48.439 JP2.6@-15.625,48.504
NetJP1_8: JP1.8 JP2.8 | length 22.1
  Top w0.152: JP2.8@-18.165,48.504 v1(-16.002,46.341)
  Bottom w0.152: JP1.8@-34.165,48.504 -32.002,46.341 v1(-16.002,46.341)
NetJP3_1: JP3.1 R4.2 | length 4.1
  Top w0.152: R4.2@-42.142,47.394 -42.142,47.702 JP3.1@-39.45,50.394
NetJP5_1: JP5.1
NetJP5_3: JP5.3 R79.2 | length 77.7
  Top w0.152: JP5.3@-39.497,8.128 -37.974,9.651 -37.974,14.604 -20.066,32.512 12.244,32.512 12.473,32.283 14.451,32.283 14.68,32.512 15.367,32.512 v1(17.399,30.48) ; v1(20.447,32.893) 20.447,33.528 21.551,34.632 R79.2@21.551,35.179
  Bottom w0.152: v1(17.399,30.48) 19.812,32.893 v1(20.447,32.893)
NetJP5_5: JP5.5
NetJP5_6: JP5.6 U6.28 | length 157.1
  Top w0.152: v1(-40.005,17.399) -39.139,17.399 -23.061,33.477 -22.477,34.061 12.419,34.061 12.978,33.503 13.946,33.503 14.759,34.315 15.452,34.315 16.163,33.604 17.196,33.604 31.369,19.431 41.148,19.431 46.101,24.384 46.101,35.687 41.173,40.615 28.804,40.615 26.747,42.672 23.114,42.672 22.318,43.468 22.318,45.51 U6.28@22.197,45.631
  Bottom w0.152: v1(-40.005,17.399) -39.497,17.399 v1(-37.973,15.875) -35.306,13.208 -35.306,7.239 JP5.6@-36.957,5.588
NetJP5_7: JP5.7 R8.1 | length 26.3
  Top w0.152: JP5.7@-39.497,3.048 -38.1,4.445 -36.322,4.445 -34.29,2.413 -34.29,-14.556 R8.1@-32.385,-16.461
NetJP5_8: JP5.8 R9.1 | length 20.9
  Top w0.152: JP5.8@-36.957,3.048 -35.56,3.048 -35.013,2.501 R9.1@-35.013,-16.249
NetQ4_1: Q4.1 R14.2 | length 2.7
  Top w0.152: R14.2@-51.622,-5.605 -50.811,-6.416 Q4.1@-49.26,-6.416
NetQ5_3: Q5.3 R20.2 | length 4.9
  Top w0.152: R20.2@27.178,-57.744 27.178,-53.67 27.201,-53.647 Q5.3@27.201,-52.871
NetQ6_3: Q6.3 R21.2 | length 4.9
  Top w0.152: R21.2@23.114,-57.744 23.201,-57.657 Q6.3@23.201,-52.871
NetQ7_3: Q7.3 R22.2 | length 4.9
  Top w0.152: R22.2@19.177,-57.744 19.177,-53.671 19.201,-53.647 Q7.3@19.201,-52.871
NetQ8_3: Q8.3 R23.2 | length 4.9
  Top w0.152: R23.2@15.113,-57.744 15.201,-57.656 Q8.3@15.201,-52.871
NetQ9_3: Q9.3 R24.2 | length 4.9
  Top w0.152: R24.2@11.176,-57.744 11.176,-56.768 11.201,-56.743 Q9.3@11.201,-52.871
NetQ10_3: Q10.3 R25.2 | length 4.9
  Top w0.152: R25.2@4.191,-57.744 4.191,-56.768 4.201,-56.758 Q10.3@4.201,-52.871
NetQ11_3: Q11.3 R26.2 | length 4.9
  Top w0.152: R26.2@0.127,-57.744 0.127,-56.768 0.201,-56.694 Q11.3@0.201,-52.871
NetQ12_3: Q12.3 R27.2
NetQ13_3: Q13.3 R28.2 | length 4.9
  Top w0.152: Q13.3@-7.799,-52.871 R28.2@-7.747,-57.744
NetQ14_3: Q14.3 R29.2 | length 4.9
  Top w0.152: Q14.3@-11.799,-52.871 R29.2@-11.684,-57.744
NetQ15_3: Q15.3 R30.2 | length 4.9
  Top w0.152: Q15.3@-18.799,-52.871 R30.2@-18.796,-57.744
NetQ16_3: Q16.3 R31.2 | length 4.9
  Top w0.152: Q16.3@-22.799,-52.871 R31.2@-22.733,-57.744
NetQ17_3: Q17.3 R32.2 | length 4.9
  Top w0.152: Q17.3@-26.799,-52.871 R32.2@-26.797,-57.744
NetQ18_3: Q18.3 R33.2 | length 4.9
  Top w0.152: Q18.3@-30.799,-52.871 R33.2@-30.734,-57.744
NetQ19_3: Q19.3 R34.2 | length 4.9
  Top w0.152: Q19.3@-34.799,-52.871 R34.2@-34.798,-57.744
NetR1_1: R1.1 U6.59 UEXT.6 | length 23.9
  Top w0.152: UEXT.6@8.255,72.898 8.255,71.462 7.798,71.462 7.151,70.815 7.151,69.901 7.798,69.254 8.928,69.254 15.495,62.687 17.641,62.687 17.836,62.492 17.836,61.651 R1.1@19.328,60.159 19.328,59.46 19.197,59.329 U6.59@19.197,56.731
NetR2_1: R2.1 U6.58 UEXT.5 | length 24.6
  Top w0.152: UEXT.5@8.255,70.358 14.224,64.389 20.442,64.389 22.378,62.453 22.378,61.264 22.244,61.13 21.599,61.13 R2.1@21.599,60.159 19.697,58.257 U6.58@19.697,56.731
NetR7_1: R7.1 U6.4 | length 8.9
  Top w0.152: R7.1@7.413,56.479 R7.1@7.348,56.544 9.369,56.544 12.482,53.431 U6.4@14.897,53.431
NetR17_1: R17.1 U6.60 | length 4.1
  Top w0.152: R17.1@17.057,60.198 17.057,59.156 18.576,57.638 18.576,56.852 U6.60@18.697,56.731
NetR68_1: R68.1 R69.2 U2.3 | length 4.8
  Top w0.152: R68.1@38.989,34.964 R69.2@41.529,34.964 41.529,32.797 U2.3@41.432,32.7
NetR70_2: R70.2 U6.42 | length 25.5
  Top w0.152: U6.42@25.997,51.931 38.596,51.931 42.152,55.487 42.291,55.626 46.341,59.676 R70.2@48.315,59.676
NetR71_2: R71.2 U6.43 | length 33.3
  Top w0.152: U6.43@25.997,52.431 37.826,52.431 46.101,60.706 52.793,60.706 R71.2@54.991,58.508
NetR75_2: R75.2 U6.33 | length 120.1
  Top w0.152: R75.2@-44.872,-19.271 -44.872,-17.821 v1(-44.831,-17.78) v1@-44.831,-17.653 ; U6.33@25.997,47.431 25.997,47.028 v1(26.67,46.355)
  Bottom w0.152: v1(-44.831,-17.78) -44.831,-16.211 -47.752,-13.29 -47.752,-10.541 -46.99,-9.779 -46.941,-9.779 -45.697,-8.534 -43.409,-8.534 -34.087,0.788 -34.087,18.541 -30.003,22.625 -30.003,22.55 -29.825,22.371 -29.572,22.371 -5.588,46.355 v1(26.67,46.355)
NetU6_5: U6.5 Y1.1 | length 6.8
  Top w0.254: 8.763,54.54 10.103,54.54 11.712,52.931 U6.5@14.897,52.931
NetU6_6: U6.6 Y1.3 | length 6.3
  Top w0.254: 8.763,52.14 9.595,52.14 9.886,52.431 U6.6@14.897,52.431
NetU6_15: U6.15 UEXT.10 | length 60.3
  Top w0.152: UEXT.10@13.335,72.898 12.192,74.041 7.366,74.041 6.985,73.66 6.985,71.755 6.819,71.589 6.819,69.901 4.356,67.437 -3.81,67.437 -3.81,50.546 0.254,46.482 7.747,46.482 9.196,47.931 U6.15@14.897,47.931
NetU6_16: U6.16 UEXT.3 | length 50.5
  Top w0.152: UEXT.3@5.715,70.358 3.099,67.742 -3.936,67.742 -4.241,67.437 -4.318,67.437 -4.318,50.623 0.128,46.177 14.776,46.177 14.776,47.552 U6.16@14.897,47.431
NetU6_17: U6.17 UEXT.4 | length 54.5
  Top w0.152: UEXT.4@5.715,72.898 4.445,74.168 1.905,74.168 -4.826,67.437 -4.826,50.7 0.001,45.872 14.902,45.872 15.276,46.246 16.082,46.246 U6.17@16.697,45.631
NetU6_44: U6.44
NetU6_45: U6.45
NetU6_50: U6.50
NetU6_55: U6.55 UEXT.9 | length 23.8
  Top w0.152: UEXT.9@13.335,70.358 12.573,69.596 12.573,67.697 14.967,65.303 20.821,65.303 21.811,64.313 22.308,64.313 23.546,63.075 23.546,59.531 22.562,58.547 21.611,58.547 21.103,58.039 21.103,57.801 21.197,57.707 U6.55@21.197,56.731
NetU6_56: U6.56 UEXT.7 | length 24
  Top w0.152: UEXT.7@10.795,70.358 12.167,68.986 12.167,67.529 14.697,64.999 20.695,64.999 21.787,63.906 22.139,63.906 23.139,62.906 23.139,59.699 22.393,58.953 21.443,58.953 20.697,58.207 U6.56@20.697,56.731
NetU6_57: U6.57 UEXT.8 | length 27.8
  Top w0.152: UEXT.8@10.795,72.898 10.795,71.462 10.338,71.462 9.691,70.815 9.691,69.901 11.519,68.072 11.76,68.072 11.76,67.361 14.427,64.694 20.568,64.694 21.762,63.5 21.971,63.5 22.733,62.738 22.733,59.868 22.225,59.36 21.275,59.36 20.291,58.376 20.291,57.801 20.197,57.707 U6.57@20.197,56.731
NetU6_61: U6.61 U7.4 | length 66.3
  Top w0.152: U7.4@-38.989,39.185 -38.849,39.045 v1(-36.449,39.045) ; U6.61@18.197,56.731 18.197,54.066 v1(18.288,53.975)
  Bottom w0.152: v1(-36.449,39.045) -13.329,39.045 -5.714,46.66 10.005,46.66 17.321,53.975 v1(18.288,53.975)
NetU6_62: U6.62 U7.1 | length 74.2
  Top w0.152: v1(-44.958,37.521) -44.463,37.521 U7.1@-42.799,39.185 ; v1(17.272,55.118) 17.697,55.543 U6.62@17.697,56.731
  Bottom w0.152: v1(-44.958,37.521) -39.497,37.521 -36.322,40.696 -12.109,40.696 -5.841,46.965 9.119,46.965 v1(17.272,55.118)
pads on no net: CORTEX.7 CORTEX.9 IC1.21 IC1.22 IC1.23 JP1.4 JP1.5 JP2.4 JP2.5 U5.4 U6.2 U6.8 U6.9 U6.10 U6.11 U6.14 U6.22 U6.23 U6.24 U6.25 U6.26 U6.27 U6.31 U6.37 U6.38 U6.39 U6.40 U6.47 U6.51 U6.52 U6.53 U6.54 X1.2 X1.3
copper on no net:
  other v1: -49.784,-4.572

## Polygon pours and split planes (outlines as drawn)
no net on Bottom (solid, pour order 38): -63.754,11.303
no net on Bottom (solid, pour order 34): -75.692,10.668